# Altium PCB PCB1.PcbDoc
Units mm, origin at the board's own origin, x right, y up, seen from the top; angles counter-clockwise.
Board outline 50.2 x 50.16 mm, 2 copper layers (Top Layer, Bottom Layer); 9 components, 12 nets, 54 pads, 0 vias.
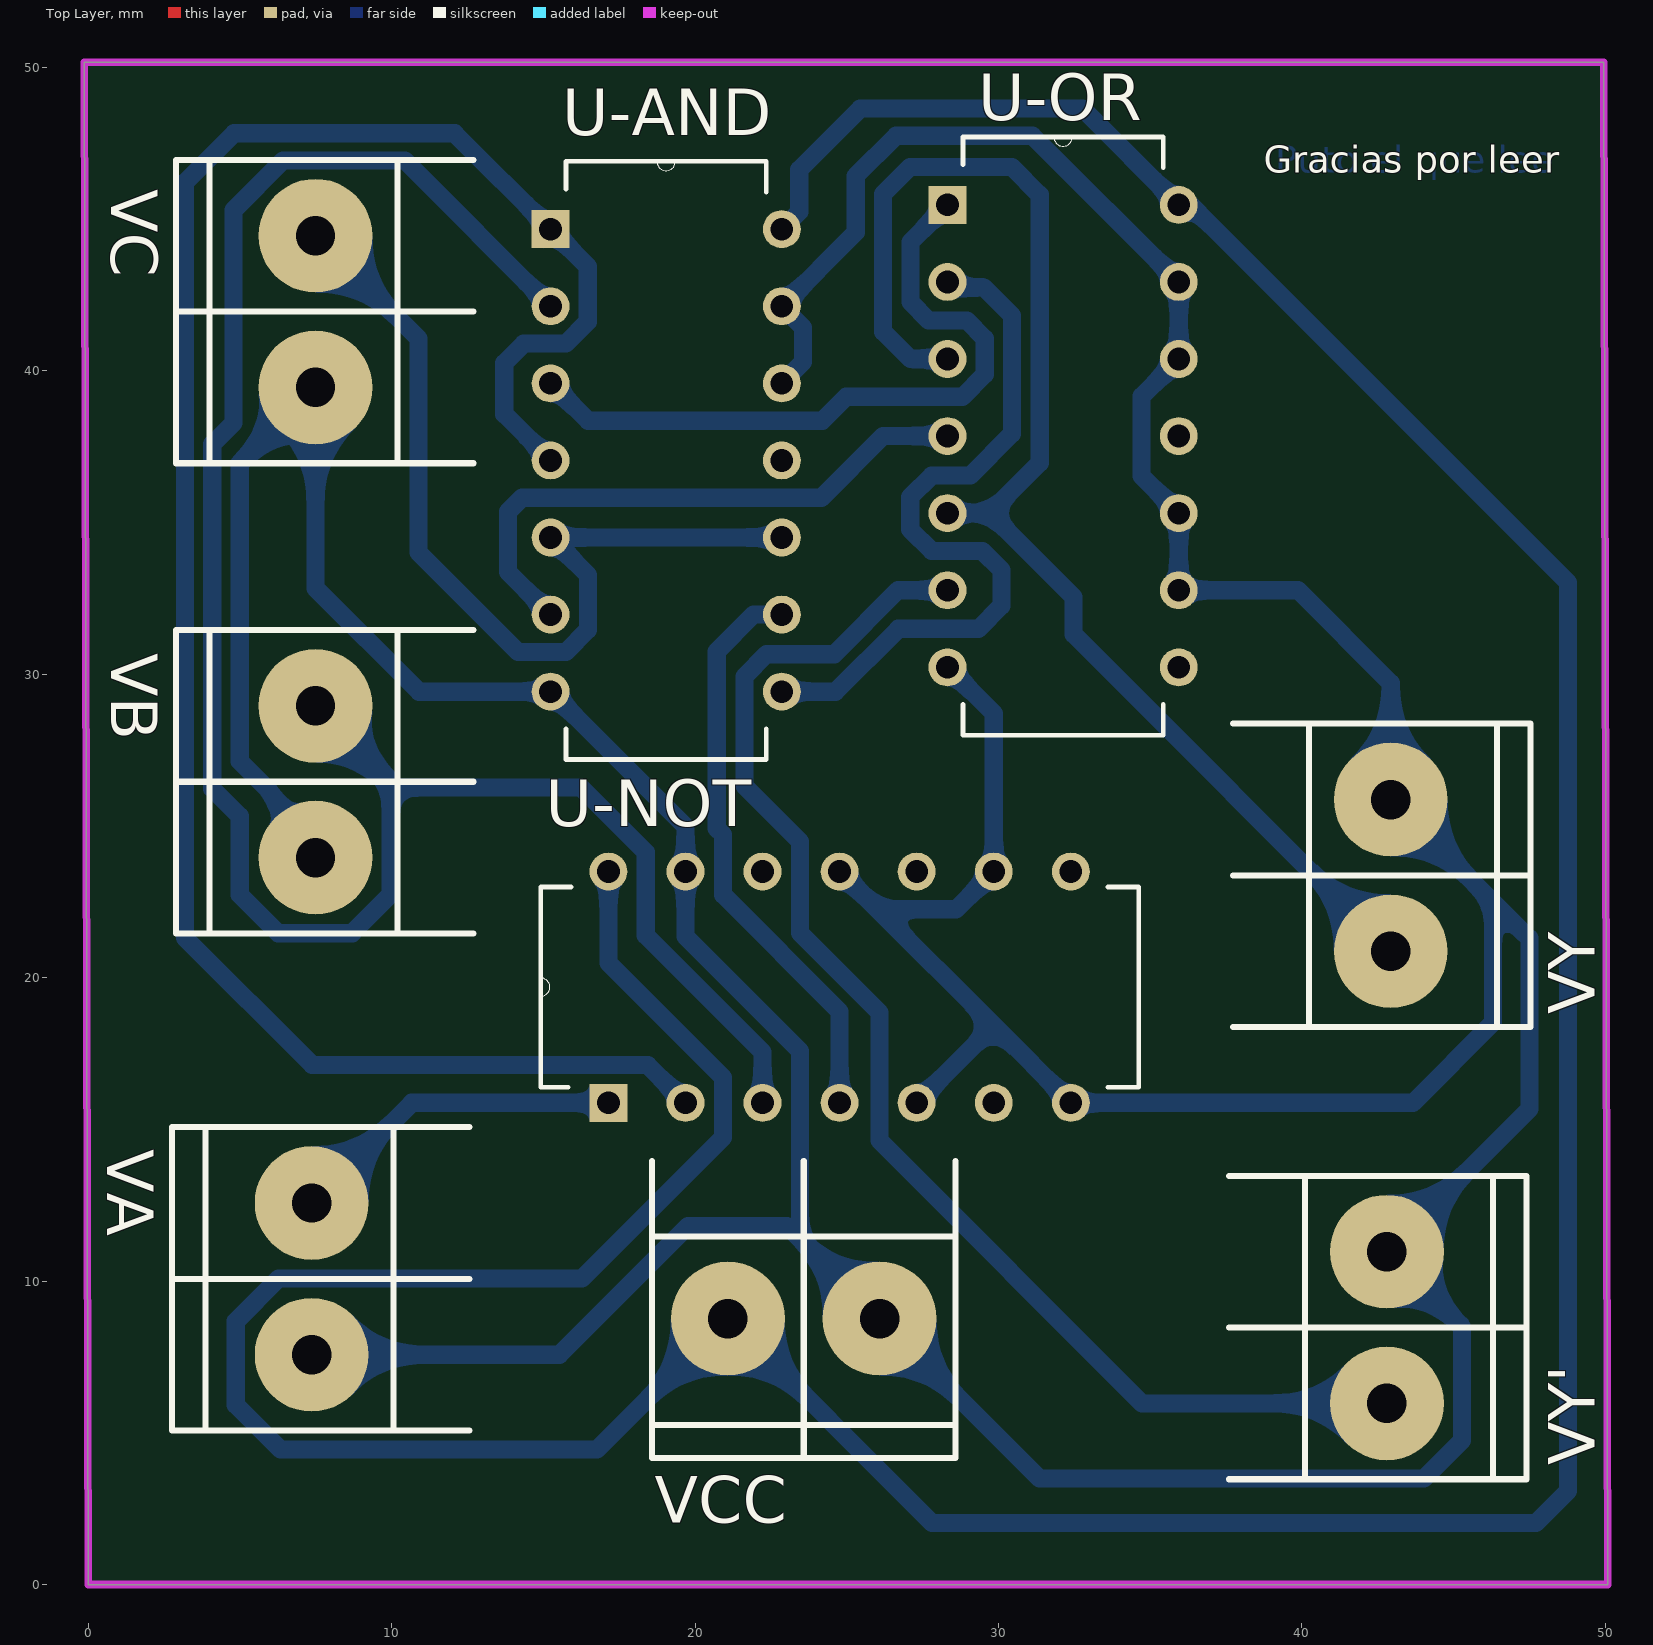
[diagram p0: Top Layer view]
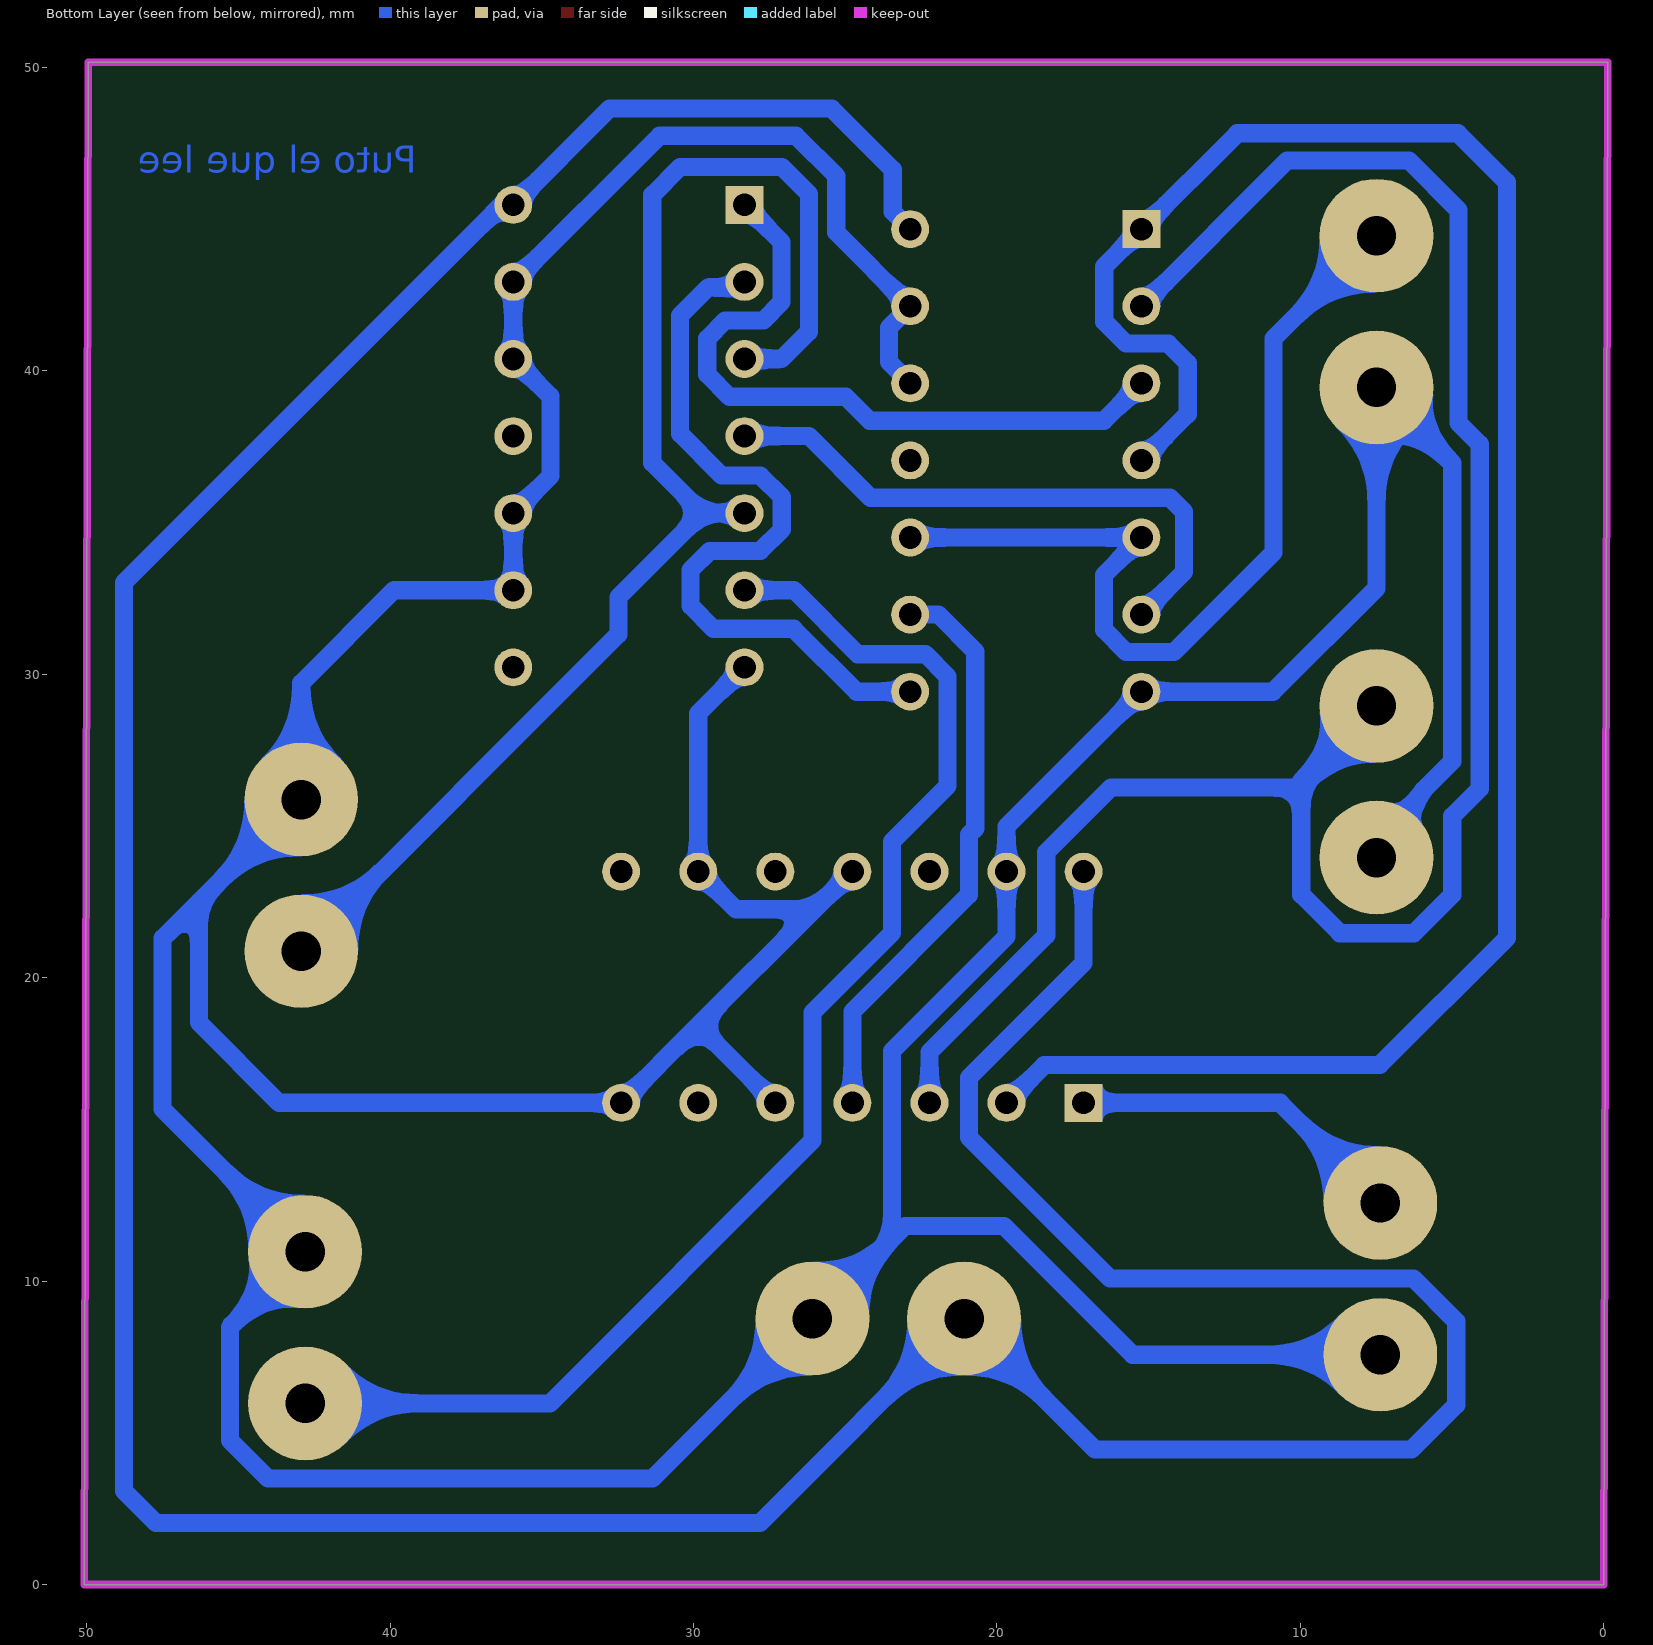
[diagram p1: Bottom Layer view, seen from below]
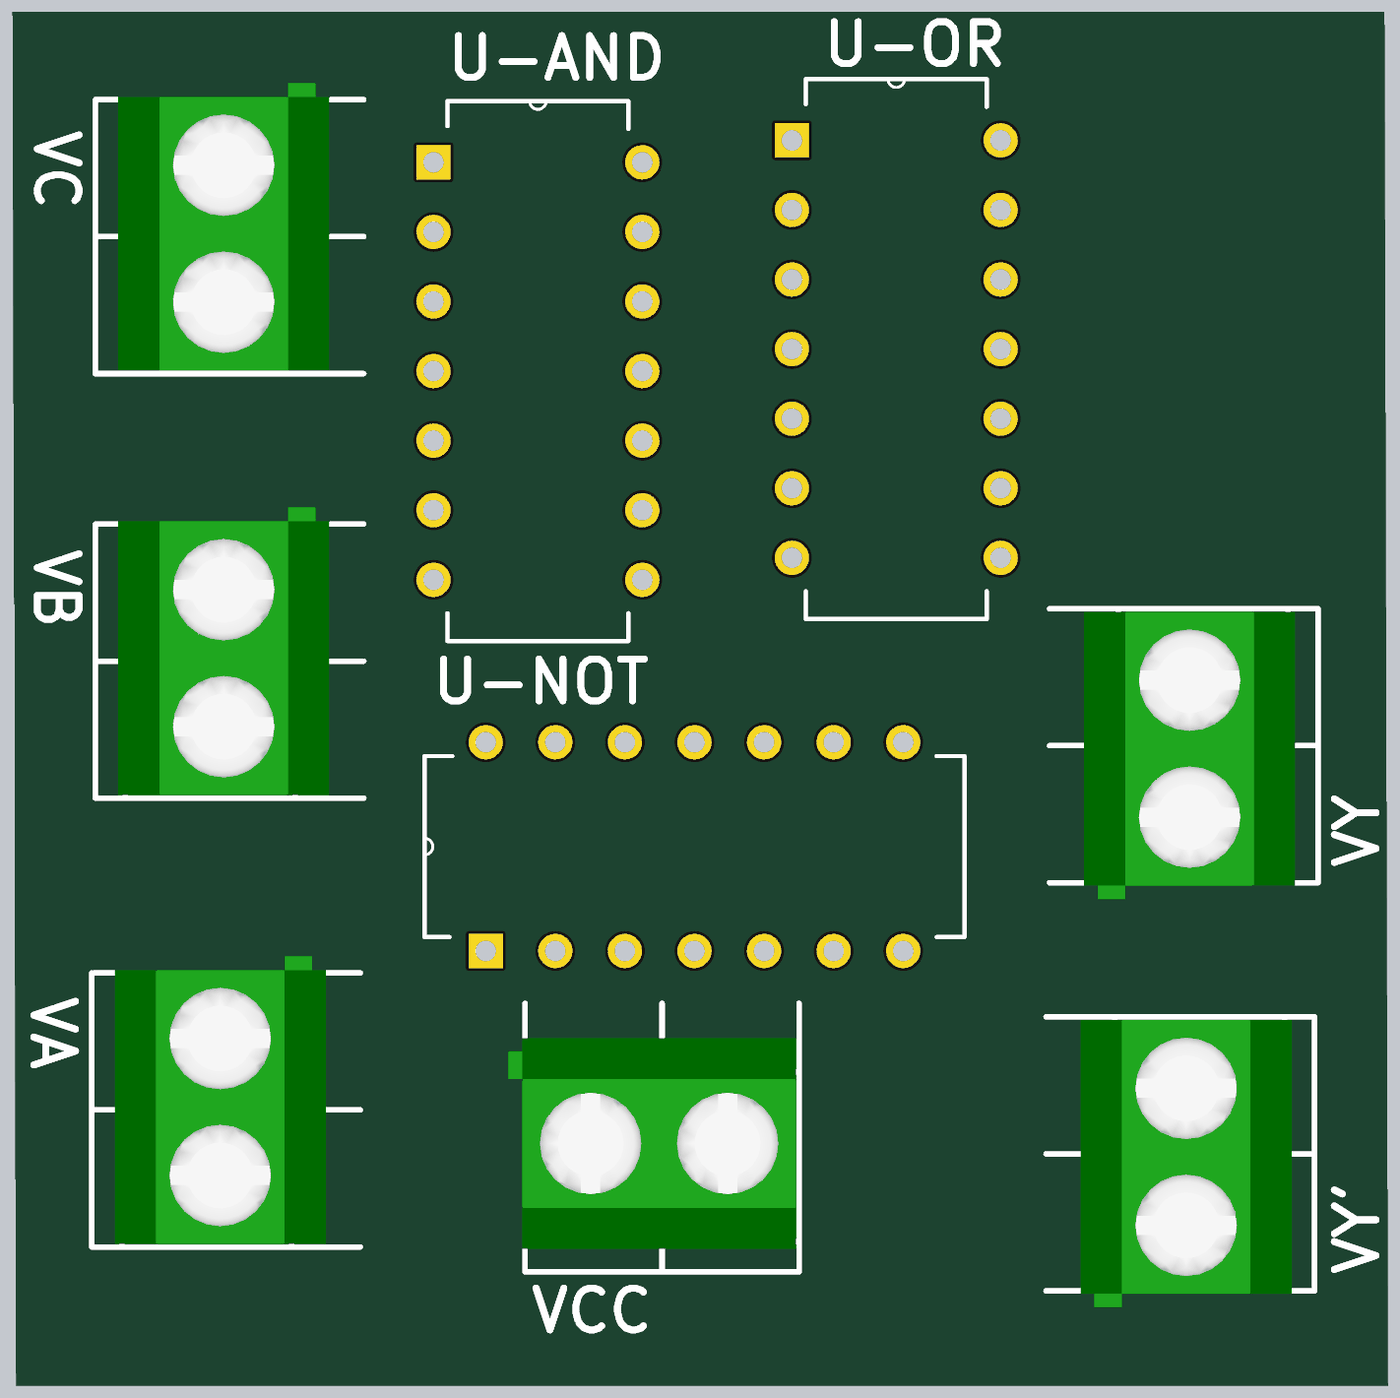
[diagram p2: 3D render of the assembled board from above, using the file's embedded part models]

## Layer stack, top to bottom
Top Solder: solder mask 0.0102, Solder Resist, Dk 3.5
Top Layer: signal copper 0.0356
Dielectric 1: dielectric 0.32, FR-4, Dk 4.8
Bottom Layer: signal copper 0.0356
Bottom Solder: solder mask 0.0102, Solder Resist, Dk 3.5

## Board outline
0,0 -0.127,50.165 49.95,50.165 50.078,0

## Design rules (kind name [scope] priority, off if disabled: settings)
Clearance [All] p1: gap=0.3 ignorepadtopadclearanceinfootprint=FALSE
PolygonConnect [All] p1: connectstyle=Relief reliefconductorwidth=0.254 reliefentries=4 polygonreliefangle="90 Angle" airgapwidth=0.254
RoutingVias [All] p1: holewidth=0.7 width=2 viastyle="Through Hole" minholewidth=0.7 minwidth=2 maxholewidth=0.7 maxwidth=2
SolderMaskExpansion [All] p1: expansion=0.102
Width [All] p1: maxlimit=0.6 minlimit=0.6 preferedwidth=0.6
30 further rules are at their usual default settings.

## Classes and differential pairs
component class Sheet1: U-NOT U-OR VA VB VC VCC VY VY'

## Components (designator, comment, footprint, x,y, rotation, side; value= is the part's Value field where it differs from the comment)
U-AND "SN74HC08N" *DIP254P762X508-14 22.86,29.424 r0 top
U-NOT "SN74HC04N" *DIP254P762X508-14 32.385,23.495 r90 top
U-OR "SN74HC32N" *DIP254P762X508-14 35.941,30.226 r0 top
VA "A IN" BORNERA2 7.366,10.073 r0 top (schematic designator JA)
VB "B IN" BORNERA2 7.493,26.456 r0 top (schematic designator JB)
VC "C IN" BORNERA2 7.493,41.95 r0 top (schematic designator JC)
VCC "VCC" BORNERA2 23.582,8.763 r90 top (schematic designator JVCC)
VY "Y OUT" BORNERA2 42.926,23.368 r180 top (schematic designator JY)
VY' "Y' OUT" BORNERA2 42.799,8.469 r180 top (schematic designator JY')

## Footprints (in the part's own frame and the unit in brackets; to place one, negate y for a bottom-side part, rotate by r counter-clockwise, add the part's x,y. Pads: shape width x height; smd on the part's side, far side on the other; paste and mask are expansions set on the pad)
*DIP254P762X508-14 [mm]
  rect 1.25x1.25 hole 0.75: 1(-7.62,15.24)
  round 1.25 hole 0.75: 2(-7.62,12.7) 3(-7.62,10.16) 4(-7.62,7.62) 5(-7.62,5.08) 6(-7.62,2.54) 7(-7.62,0) 8(0,0) 9(0,2.54) 10(0,5.08) 11(0,7.62) 12(0,10.16) 13(0,12.7) 14(0,15.24)
  silkscreen extent -7.11,-2.24 -0.51,17.48
BORNERA2 [mm] "Bornera con Tornillos 5mm separación"
  round 3.75 hole 1.3: 1(0,2.5) 2(0,-2.5)
  silkscreen extent -4.6,-5 5.2,5, body extent -3.76,-4.89 3.94,5.61, height 10

## Part data
U-AND: Package="PDIP-14 Signetics", Digi-Key_Part_Number=296-1570-5-ND, Digi-Key_Purchase_URL=https://www.digikey.com/product-detail/en/texas-instruments/SN74HC08N/296-1570-5-ND/277216?utm_source=snapeda&utm_medium=aggregator&utm_campaign=symbol, MF="Texas Instruments", MP=SN74HC08N, SnapEDA_Link=https://www.snapeda.com/parts/SN74HC08N/Texas%20Instruments/view-part/?ref=snap
U-NOT: "Inverter 6-Element CMOS 14-Pin PDIP Inverter 6-Element CMOS 14-Pin PDIP Inverter 6-Element CMOS 14-Pin PDIP", Package="DIP-14 Texas Instruments", Availability=Unavailable, MF="Texas Instruments", MP=SN74HC04N, Price=None, SnapEDA_Link=https://www.snapeda.com/parts/SN74HC04N/Texas%20Instruments/view-part/?ref=snap
U-OR: "IC: digital; Channels: 4; OR; Inputs: 2; THT; DIP14; Seri", Package="DIP-14 Texas Instruments", Availability=Unavailable, MF="Texas Instruments", MP=SN74HC32N, Price=None, SnapEDA_Link=https://www.snapeda.com/parts/SN74HC32N/Texas%20Instruments/view-part/?ref=snap
VA VB VC VCC VY VY': library part "BORNERA 2"

## Nets (pads, with @x,y where several pads share a name; then routed paths per layer and width w, separated by ;. In a path a pad name is that pad's centre, name@x,y a point inside that pad or via, vN(x,y) a via of type N, cw(c..) or ccw(c..) an arc to the next point about the centre after c; other vN are vias at no path point)
GND: U-AND.7 U-AND.12 U-AND.13 U-NOT.5 U-NOT.7 U-NOT.9 U-NOT.11 U-NOT.13 U-OR.7 U-OR.9 U-OR.10 U-OR.12 U-OR.13 VA.2 VB.2 VC.2 VCC.2 VY'.2 VY.2 | length 214.2
  Bottom Layer w0.6: VA.2 15.538,7.573 19.776,11.811 23.034,11.811 23.459,11.386 ; VB.2 5.916,26.211 4.993,27.134 4.993,36.95 VC.2 7.493,32.832 10.901,29.424 U-AND.7 19.685,24.979 U-NOT.13 19.685,21.355 23.459,17.581 23.459,11.386 ; U-AND.12 23.561,40.285 23.561,41.423 U-AND.13 25.296,44.56 25.296,46.41 26.627,47.741 31.126,47.741 U-OR.13 U-OR.12 34.711,39.156 34.711,36.536 U-OR.10 U-OR.9 39.867,32.766 42.926,29.707 VY.2 46.301,22.493 ; U-NOT.11 26.01,22.25 ; U-NOT.5 29.845,18.415 ; U-OR.7 29.845,28.702 U-NOT.9 28.6,22.25 26.01,22.25 ; 23.459,11.386 VCC.2 31.351,3.494 44.022,3.494 45.278,4.75 45.278,8.49 VY'.2 47.498,15.668 47.498,21.296 46.301,22.493 ; 26.01,22.25 29.845,18.415 ; 29.845,18.415 U-NOT.7 43.655,15.875 46.301,18.521 46.301,22.493
NetU-AND_1: U-AND.1 U-AND.4 U-NOT.2 | length 68.4
  Bottom Layer w0.6: U-AND.4 13.716,38.568 13.716,40.259 14.356,40.899 15.747,40.899 16.465,41.617 16.465,43.439 U-AND.1 12.079,47.825 4.81,47.825 3.193,46.208 3.193,21.313 7.387,17.12 18.44,17.12 U-NOT.2
NetU-AND_3: U-AND.3 U-OR.1 | length 23.3
  Bottom Layer w0.6: U-AND.3 16.47,38.354 24.196,38.354 24.983,39.141 28.809,39.141 29.546,39.878 29.546,41.066 28.956,41.656 27.701,41.656 27.096,42.261 27.096,44.241 U-OR.1
NetU-AND_6: U-AND.6 U-OR.4 | length 19.5
  Bottom Layer w0.6: U-AND.6 13.832,33.372 13.832,35.353 14.294,35.814 24.164,35.814 26.196,37.846 U-OR.4
NetU-AND_8: U-AND.8 U-OR.2 | length 24.9
  Bottom Layer w0.6: U-AND.8 24.627,29.424 26.699,31.496 29.337,31.496 30.099,32.258 30.099,33.428 29.465,34.061 27.802,34.061 27.091,34.773 27.091,35.839 27.802,36.551 29.072,36.551 30.446,37.924 30.446,41.817 29.523,42.74 28.507,42.74 U-OR.2
NetU-AND_9: U-AND.9 U-NOT.4 | length 19.2
  Bottom Layer w0.6: U-AND.9 21.931,31.964 20.716,30.749 20.716,24.917 20.919,24.714 20.919,22.733 24.765,18.887 U-NOT.4
VA: U-NOT.1 VA.1 | length 11.1
  Bottom Layer w0.6: VA.1 10.668,15.875 U-NOT.1
VB: U-AND.2 U-NOT.3 VB.1 | length 72.4
  Bottom Layer w0.6: U-AND.2 10.439,46.925 6.427,46.925 4.79,45.288 4.79,38.278 4.093,37.581 4.093,26.224 4.993,25.324 4.993,22.733 6.263,21.463 8.702,21.463 9.972,22.733 9.972,26.264 ; U-NOT.3 22.225,17.542 18.379,21.388 18.379,24.13 16.245,26.264 9.972,26.264 ; 9.972,26.264 VB.1 9.972,26.477 9.972,26.264
VC: U-AND.5 U-AND.10 VC.1 | length 30.3
  Bottom Layer w0.6: VC.1 10.886,41.057 10.886,34.016 14.168,30.734 15.742,30.734 16.474,31.466 16.474,33.27 U-AND.5 U-AND.10
VCC: U-AND.14 U-NOT.14 U-OR.14 VCC.1 | length 145.9
  Bottom Layer w0.6: U-NOT.14 17.145,20.487 20.919,16.713 20.919,14.732 16.271,10.084 6.274,10.084 4.866,8.676 4.866,5.918 6.339,4.445 16.764,4.445 VCC.1 27.813,2.032 47.716,2.032 48.768,3.084 48.768,33.02 36.322,45.466 U-OR.14 32.766,48.641 25.446,48.641 23.436,46.632 23.436,45.24 U-AND.14
VY: U-OR.3 U-OR.5 VY.1 | length 45.4
  Bottom Layer w0.6: U-OR.5 29.707,35.306 ; U-OR.3 27.096,40.386 26.196,41.286 26.196,45.822 27.085,46.711 30.444,46.711 31.358,45.796 31.358,36.957 29.707,35.306 ; VY.1 32.476,31.318 32.476,32.537 29.707,35.306
VY': U-OR.6 VY'.1 | length 45.3
  Bottom Layer w0.6: U-OR.6 26.697,32.766 24.588,30.658 22.361,30.658 21.63,29.927 21.63,26.314 23.459,24.486 23.459,21.466 26.075,18.85 26.075,14.63 34.737,5.969 VY'.1
pads on no net: U-AND.11 U-NOT.6 U-NOT.8 U-NOT.10 U-NOT.12 U-OR.8 U-OR.11

## Keep-outs
Keep-Out Layer:
  the board outline again, w0.254

## Other copper
Bottom Layer:
  text "Puto el que lee" at 39.116,46.228 h1.52

## Silkscreen, mask and mechanical layers (free items; w line width, h text height)
Top Overlay:
  text "Gracias por leer" at 38.735,46.228 h1.52